# Altium PCB AMA4B_Core_board.PcbDoc (part 2 of 3)
Units mm, origin at the board's own origin, x right, y up, seen from the top; angles counter-clockwise.
Board outline 16 x 22 mm, 4 copper layers (TOP, LY2 - GND, LY3 - GND, BOTTOM), stack 0.771 mm thick; 43 components, 117 nets, 318 pads, 236 vias.
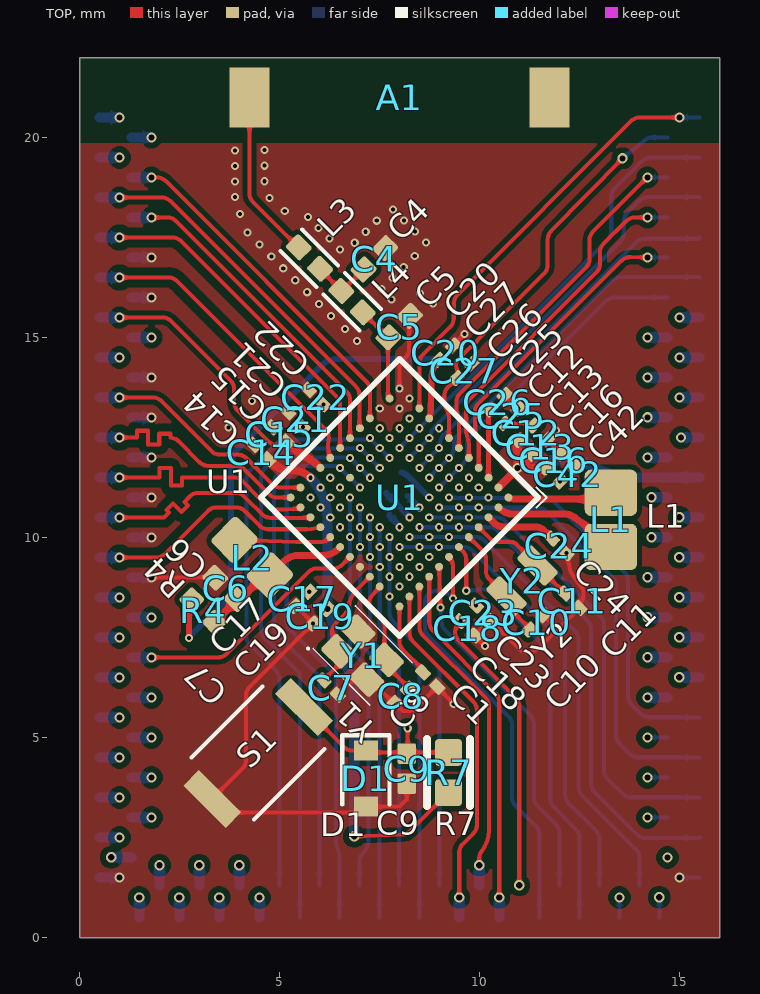
[diagram p0: TOP view]

## Via types
v1: diameter 0.254, hole 0.152, TOP to BOTTOM, tented both sides, 84 vias
v2: diameter 0.203, hole 0.102, TOP to BOTTOM, tented both sides, 84 vias
v3: diameter 0.203, hole 0.102, TOP to LY2 - GND, tented both sides, 40 vias
v4: diameter 0.203, hole 0.102, TOP to LY3 - GND, tented both sides, 28 vias

## Nets (pads, with @x,y where several pads share a name; then routed paths per layer and width w, separated by ;. In a path a pad name is that pad's centre, name@x,y a point inside that pad or via, vN(x,y) a via of type N, cw(c..) or ccw(c..) an arc to the next point about the centre after c; other vN are vias at no path point) (continued)
M5SDA_M5MOSI_I2S1DAT_RX23_I2S1DOUT_GP48: (continued)
  TOP w0.102: U1.E1@9.732,11.99 9.732,12.34 ccw(c9.428,12.34) 9.718,12.432 9.682,12.548 cw(c9.973,12.639) 9.668,12.639 9.668,13.003 ccw(c9.363,13.003) 9.665,13.048 9.665,13.1 ccw(c9.36,13.099) 9.663,13.128 cw(c10.1,13.172) 9.665,13.233 ccw(c9.363,13.274) 9.667,13.25 9.669,13.274 cw(c9.973,13.25) 9.756,13.465 12.924,16.633 ccw(c12.709,16.848) 13.013,16.848 13.013,17.13 cw(c13.318,17.13) 13.103,17.346 13.668,17.912 cw(c13.883,17.695) 13.882,18 ; 13.883,18 v1(14.2,18)
  BOTTOM w0.102: v1(14.2,18) U2.5@14.7,18
M6MISO_CKO_I2S1WS_RX23_TE_GP63: U1.M6 U2.101 | length 8.4
  TOP w0.102: v1(1.8,18) 2.21,18 cw(c2.21,17.733) 2.399,17.921 6.684,13.636 cw(c6.496,13.447) 6.763,13.447 6.763,13.335 U1.M6@6.763,12.485
  BOTTOM w0.254: U2.101@1.3,18 v1(1.8,18)